# Altium PCB CT310高端控制盒核心板电路V1.3.PcbDoc (part 6 of 10)
Units mil, origin at the board's own origin, x right, y up, seen from the top; angles counter-clockwise.
Board outline 3735.76 x 4625 mil, 2 copper layers (TOP, BOTTOM), stack 10.4 mil thick; 198 components, 362 nets, 1085 pads, 352 vias.
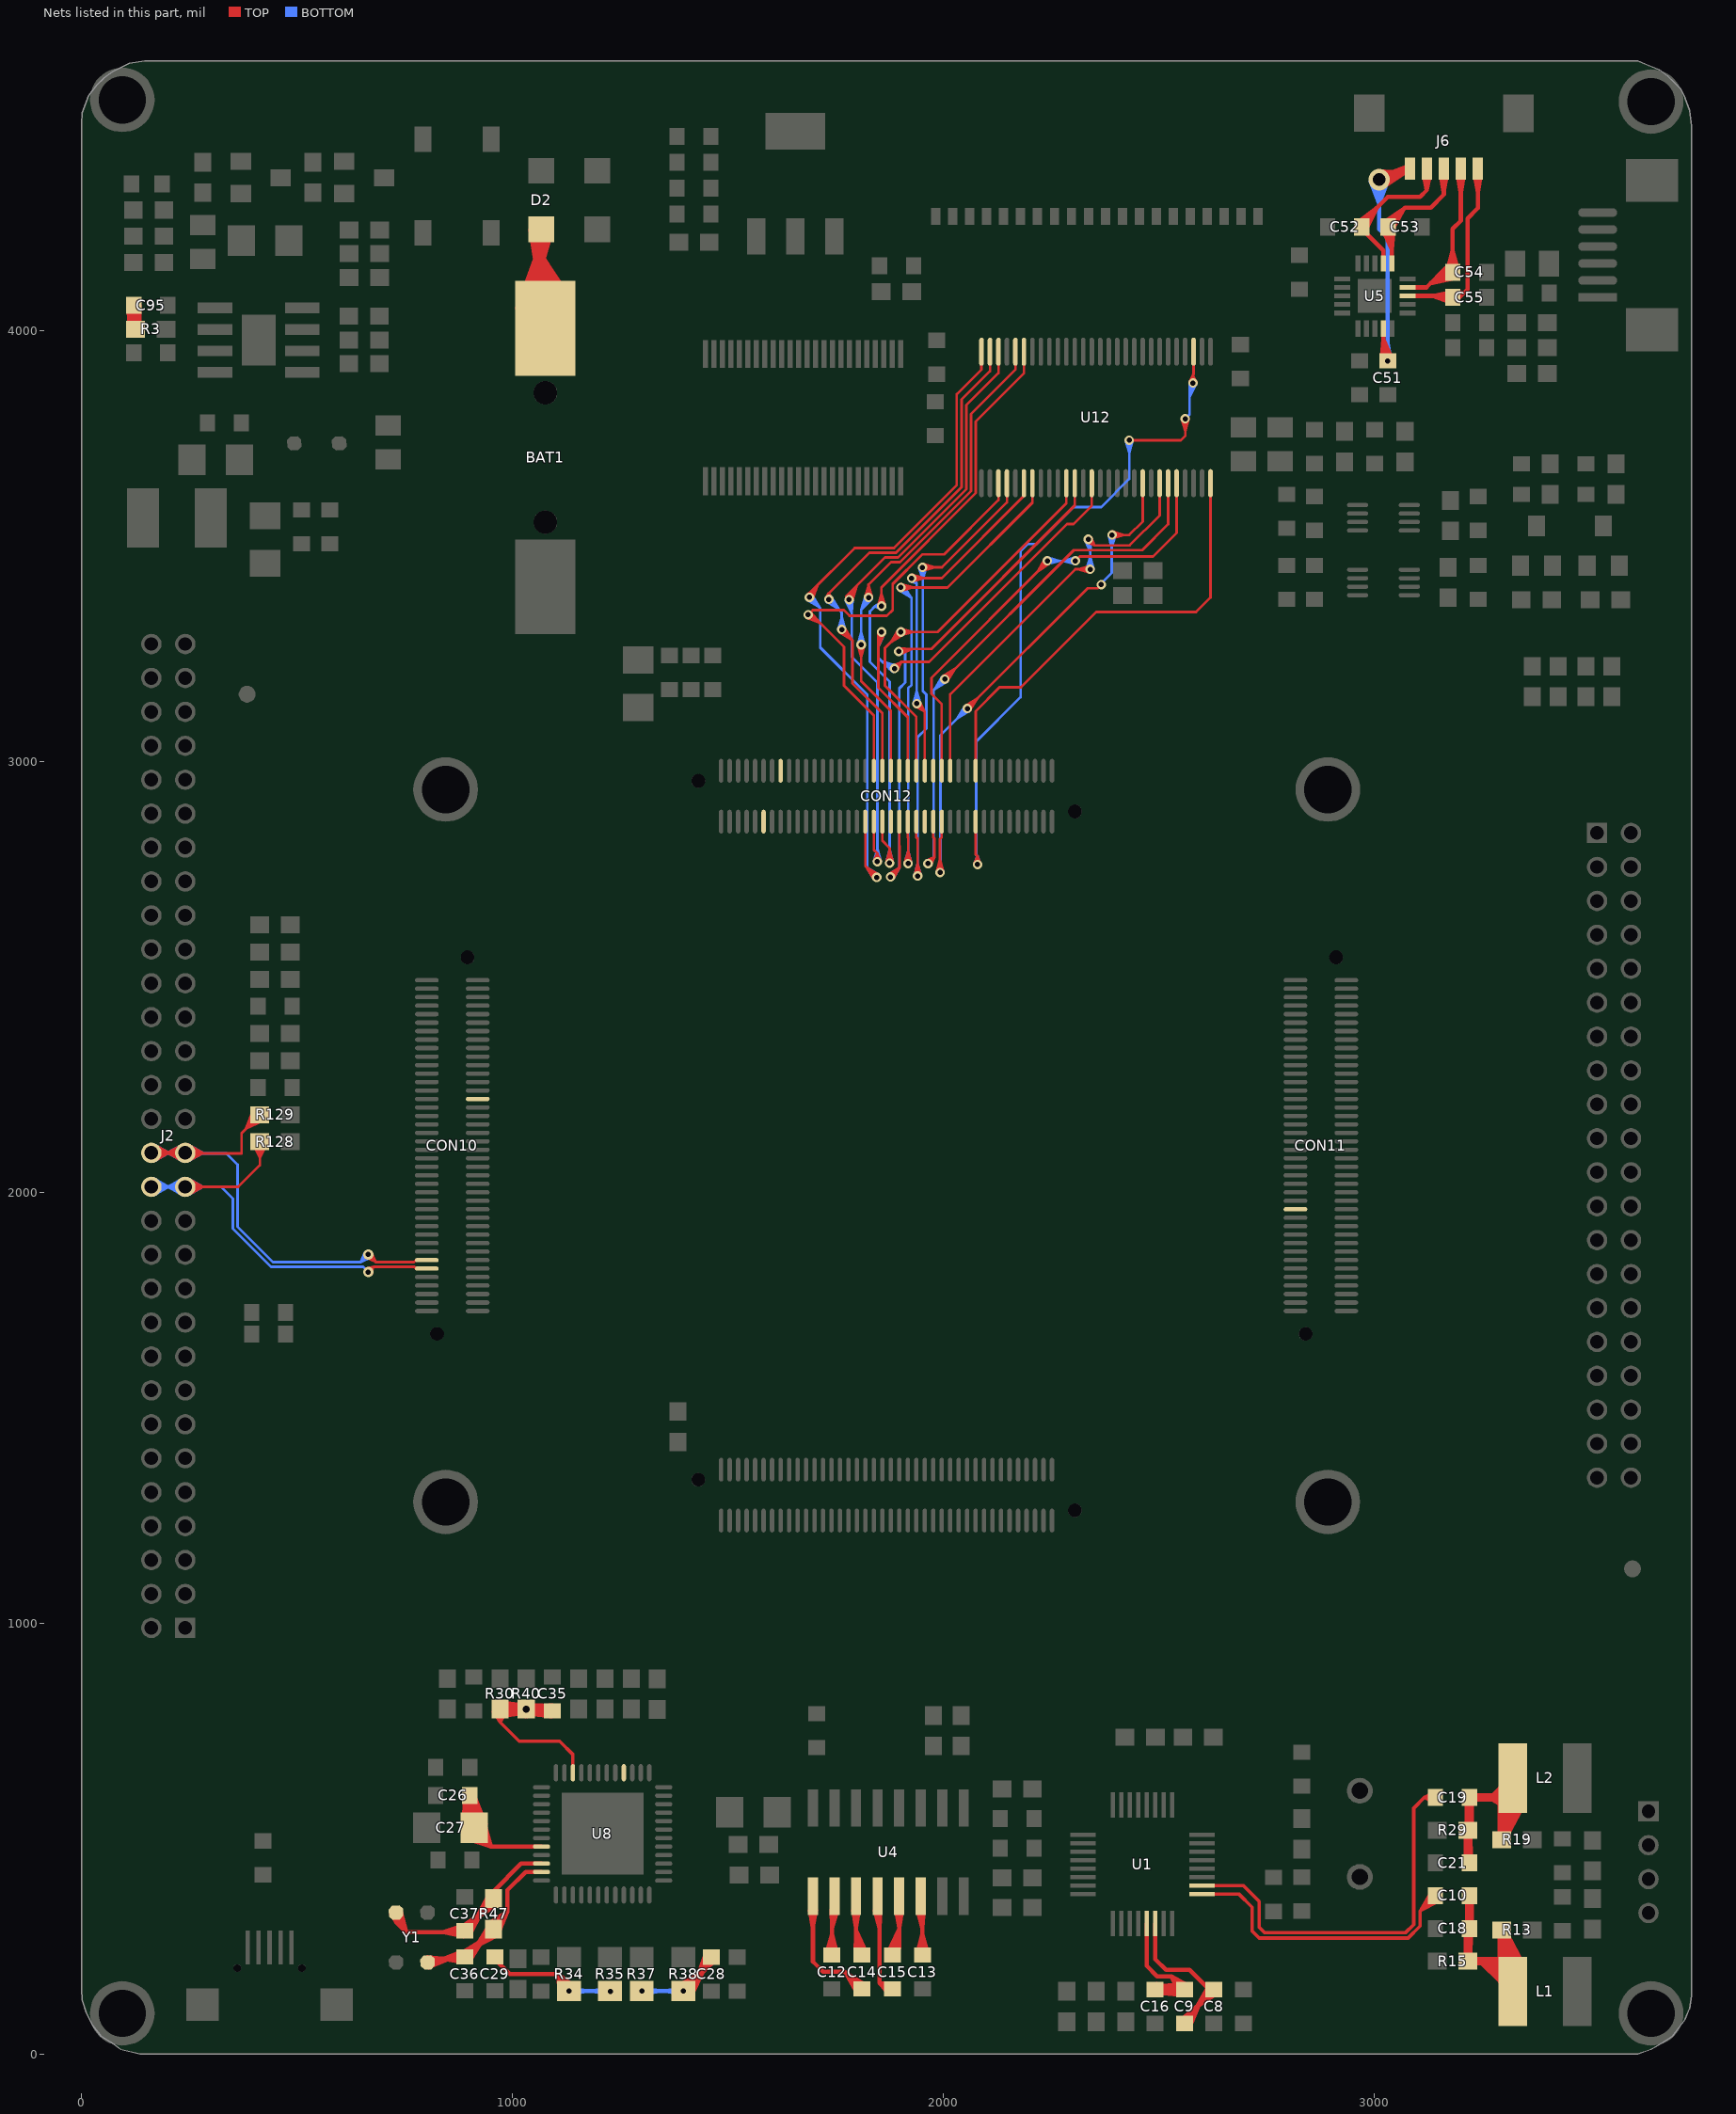
[diagram p6: the nets of this part, all layers, seen from the top]

## Via types
v1: diameter 22, hole 12, TOP to BOTTOM, tented both sides, 177 vias
v2: diameter 22, hole 12, TOP to BOTTOM, 89 vias
v3: diameter 28, hole 16, TOP to BOTTOM, 37 vias
v4: diameter 30, hole 20, TOP to BOTTOM, tented both sides, 26 vias
v5: diameter 24, hole 12, TOP to BOTTOM, 17 vias
v6: diameter 50, hole 30, TOP to BOTTOM, tented both sides, 5 vias
v7: diameter 40, hole 24, TOP to BOTTOM, 1 vias

## Nets (pads, with @x,y where several pads share a name; then routed paths per layer and width w, separated by ;. In a path a pad name is that pad's centre, name@x,y a point inside that pad or via, vN(x,y) a via of type N, cw(c..) or ccw(c..) an arc to the next point about the centre after c; other vN are vias at no path point) (continued)
LCD_VD4: CON12.27 U12.20 | length 1701.9
  TOP w6: v2@1983.69,2742.67 1991.61,2770.57 v2@1999.54,2742.67 ; v2(1991.61,2741.57) 1991.61,2819.43 1995.54,2823.36 ; CON12.27@1995.54,2837.36 1995.54,2823.36 ; CON12.27@1995.54,2859.86 1995.54,2823.36 ; v2@2049.97,3128.86 2078.64,3146.3 v2@2061.2,3117.63 ; v2(2054.91,3122.57) 2333.91,3401.57 2357.33,3401.57 v1(2365.76,3410) ; v1(2390.76,3525) 2430.76,3525 2461.88,3556.12 U12.20@2461.88,3645.4 ; v1@2391.86,3517.08 2419.76,3525 v1@2391.86,3532.92 ; 2461.88,3594.92 U12.20@2461.88,3618.23
  BOTTOM w6: v2@1983.79,2743.26 1991.61,2760.57 ; v2(1991.61,2741.57) 1991.61,2760.57 ; v2@1999.43,2743.26 1991.61,2760.57 ; v2@2048.62,3127.51 2031.18,3098.84 ; v2@2059.85,3116.28 2031.18,3098.84 ; v1(2365.76,3410) 2365.76,3413.13 2389.76,3437.13 2389.76,3524 v1(2390.76,3525) 2389.76,3495.96 ; v1@2382.8,3524.17 2389.76,3495.96 ; v1@2398.64,3523.63 2389.76,3495.96 ; 1991.61,2760.57 1992.61,2761.57 1992.61,3060.28 v2(2054.91,3122.57) 2031.18,3098.84
LCD_VD5: CON12.26 U12.22 | length 1290.5
  TOP w6: CON12.26@2015.23,2977.98 2015.23,3155.13 2305.67,3445.57 v1(2340.19,3445.57) 2311.19,3445.57 ; CON12.26@2015.23,3000.48 2015.23,3023.48 ; v1@2331.36,3508.32 2349.76,3501 ; v1(2335.76,3515) 2349.76,3501 ; v1@2339.09,3437.65 2311.19,3445.57 ; v1@2339.09,3453.49 2311.19,3445.57 ; v1@2342.44,3519.4 2349.76,3501 ; 2501.25,3594.92 U12.22@2501.25,3618.23 ; U12.22@2501.25,3645.4 2501.25,3570.49 2431.76,3501 2349.76,3501
  BOTTOM w6: v1@2328.07,3512.8 2340.19,3485.02 ; v1@2332.27,3446.67 2340.19,3474.57 v1@2348.11,3446.67 ; v1(2340.19,3445.57) 2340.19,3510.57 v1(2335.76,3515) 2340.19,3485.02 ; v1@2343.76,3515.11 2340.19,3485.02
LCD_VD6: CON12.29 U12.23 | length 1596.8
  TOP w6: v2@1959.13,2769.19 1978.61,2777.57 ; v2(1963.61,2762.57) 1978.61,2777.57 ; v2@1970.24,2758.08 1978.61,2777.57 ; CON12.29@1975.86,2837.36 1975.86,2823.36 ; CON12.29@1975.86,2859.86 1975.86,2823.36 ; v2@1997.81,3197 2026.48,3214.44 v2@2009.05,3185.77 ; v2(2002.76,3190.71) 2302.04,3490 2460.76,3490 2520.94,3550.18 U12.23@2520.94,3645.4 ; 2520.94,3594.92 U12.23@2520.94,3618.23 ; 1975.86,2823.36 1978.61,2820.61 1978.61,2777.57
  BOTTOM w6: v2@1959.27,2769.29 1977.05,2776.01 ; v2(1963.61,2762.57) 1977.05,2776.01 ; v2@1970.33,2758.23 1977.05,2776.01 ; v2@1996.47,3195.66 1979.03,3166.99 ; v2@2007.7,3184.42 1979.03,3166.99 ; 1977.05,2776.01 1977.05,3165.01 v2(2002.76,3190.71) 1979.03,3166.99
LCD_VD7: CON12.28 U12.24 | length 1313.8
  TOP w6: CON12.28@1995.54,2977.98 1995.54,3132.65 1971.61,3156.57 1971.61,3193.57 2240.76,3462.72 v1(2240.76,3465) 2218.16,3440.12 ; CON12.28@1995.54,3000.48 1995.54,3023.48 ; v1@2234.24,3469.64 2218.16,3440.12 ; v1@2246,3458.95 2218.16,3440.12 ; v1(2305.76,3465) 2315.76,3475 2485.76,3475 2540.62,3529.86 U12.24@2540.62,3645.4 ; 2540.62,3594.92 U12.24@2540.62,3618.23
  BOTTOM w6: v1(2240.76,3465) v1(2305.76,3465) ; v1@2241.86,3457.08 2269.76,3465 v1@2241.86,3472.92 ; v1@2304.66,3457.08 2276.76,3465 v1@2304.66,3472.92
LCD_VD8: CON12.31
LCD_VD9: CON12.30
LCD_VD10: CON12.33 U12.4 | length 1452.1
  TOP w6: v2@1931.69,2734.67 1939.61,2762.57 v2@1947.54,2734.67 ; CON12.33@1936.49,2837.36 1936.49,2823.36 ; CON12.33@1936.49,2859.86 1936.49,2823.36 ; v2(1939.61,2733.57) 1939.61,2820.24 1936.49,2823.36 ; v1(1950.76,3450) 1996.32,3450 2146.92,3600.6 ; v1@1951.86,3442.08 1979.76,3450 v1@1951.86,3457.92 ; U12.4@2146.92,3618.23 2146.92,3600.6 ; U12.4@2146.92,3645.4 2146.92,3600.6
  BOTTOM w6: v2@1931.69,2734.67 1939.61,2762.57 v2@1947.54,2734.67 ; v2(1939.61,2733.57) 1939.61,3055.57 1959.61,3075.57 1959.61,3154.86 1951.61,3162.86 1951.61,3449.15 v1(1950.76,3450) 1951.61,3420.97 ; v1@1942.87,3448.67 1951.61,3420.97 ; v1@1958.71,3449.13 1951.61,3420.97
LCD_VD11: CON12.32 U12.6 | length 1053.9
  TOP w6: v1(1925.76,3425) 1995.76,3425 2186.29,3615.53 U12.6@2186.29,3645.4 ; v1@1926.86,3417.08 1954.76,3425 v1@1926.86,3432.92 ; v2@1932.89,3127.12 1956.17,3115.02 ; v2(1937.61,3133.57) 1956.17,3115.02 ; v2@1944.07,3138.3 1956.17,3115.02 ; CON12.32@1956.17,2977.98 1956.17,3115.02 ; CON12.32@1956.17,3000.48 1956.17,3023.48
  BOTTOM w6: v1@1921.62,3418.16 1937.61,3413.15 ; v1(1925.76,3425) 1937.61,3413.15 ; v2@1929.69,3134.67 1937.61,3162.57 v2@1945.54,3134.67 ; v1@1932.6,3429.14 1937.61,3413.15 ; v2(1937.61,3133.57) 1937.61,3413.15
LCD_VD12: CON12.35 U12.7 | length 1457.1
  TOP w6: v1(1900.76,3403.42) 2009.18,3403.42 2205.98,3600.22 ; v1@1901.86,3395.5 1929.76,3403.42 v1@1901.86,3411.35 ; v2@1909.69,2763.67 1917.61,2791.57 v2@1925.54,2763.67 ; CON12.35@1916.8,2837.36 1916.8,2823.36 ; CON12.35@1916.8,2859.86 1916.8,2823.36 ; v2(1917.61,2762.57) 1917.61,2822.54 1916.8,2823.36 ; U12.7@2205.98,3618.23 2205.98,3600.22 ; U12.7@2205.98,3645.4 2205.98,3600.22
  BOTTOM w6: v1@1895.82,3397.13 1924.49,3379.7 v1@1907.05,3408.37 ; v1(1900.76,3403.42) 1925.61,3378.57 1925.61,3177.57 1917.61,3169.57 v2(1917.61,2762.57) ; v2@1909.69,2763.67 1917.61,2791.57 v2@1925.54,2763.67
LCD_VD13: CON12.34 U12.11 | length 1122.8
  TOP w6: v2@1894.47,3304.94 1877.03,3276.27 ; v2@1901.86,3292.08 1929.76,3300 v2@1901.86,3307.92 ; v2@1905.7,3293.71 1877.03,3276.27 ; CON12.34@1936.49,2977.98 1936.49,3102.69 1863.61,3175.57 1863.61,3262.85 v2(1900.76,3300) ; CON12.34@1936.49,3000.48 1936.49,3023.48 ; U12.11@2284.72,3618.23 2284.72,3598.96 ; U12.11@2284.72,3645.4 2284.72,3598.96 ; 1877.03,3276.27 v2(1900.76,3300) ; v2(1900.76,3300) 1985.76,3300 2284.72,3598.96
LCD_VD14: CON12.37 U12.12 | length 1578.7
  TOP w6: v2@1871.77,2737.94 1897.61,2752.57 ; v2(1876.61,2731.57) 1897.61,2752.57 ; v2@1882.98,2726.73 1897.61,2752.57 ; v2@1895.36,3262.99 1927.32,3260.57 ; v2(1895.76,3255) 1927.32,3260.57 ; 1897.12,2814.36 CON12.37@1897.12,2837.36 ; CON12.37@1897.12,2859.86 1897.12,2804.35 1897.61,2803.86 1897.61,2752.57 ; v2@1898.12,3247.36 1927.32,3260.57 ; v2@1903.61,3260.57 1971.33,3260.57 2304.4,3593.64 U12.12@2304.4,3645.4 ; 2304.4,3594.92 U12.12@2304.4,3618.23
  BOTTOM w6: v2@1871.79,2737.96 1897.05,2752.01 ; v2(1876.61,2731.57) 1897.05,2752.01 ; v2@1883,2726.75 1897.05,2752.01 ; v2(1895.76,3255) 1910.76,3253.42 ; v2@1897.06,3247.11 1910.76,3253.42 ; v2@1898.68,3262.45 1910.76,3253.42 ; v2@1903.61,3260.57 1910.76,3253.42 ; 1897.05,2752.01 1897.05,3169.01 1910.76,3182.72 1910.76,3253.42
LCD_VD15: CON12.36 U12.14 | length 1584.8
  TOP w6: v2@1847.8,3300.76 1848.61,3267.26 ; v2@1863.32,3297.37 1848.61,3267.26 ; v2@1881.23,3221.6 1901.21,3230.45 ; v2(1885.76,3215) 1901.21,3230.45 ; v2@1892.36,3210.47 1901.21,3230.45 ; CON12.36@1916.8,2977.98 1916.8,3102.39 1848.61,3170.57 1848.61,3292.85 v2(1855.76,3300) 1848.61,3267.26 ; CON12.36@1916.8,3000.48 1916.8,3023.48 ; 2343.77,3594.92 U12.14@2343.77,3618.23 ; U12.14@2343.77,3645.4 2343.77,3593.01 2301.33,3550.57 2286.33,3550.57 1966.21,3230.45 1901.21,3230.45
  BOTTOM w6: v2@1847.79,3300.74 1848.61,3266.53 ; 1848.61,3290.57 1848.61,3240 1873.61,3215 ; v2(1855.76,3300) 1848.61,3266.53 ; v2@1863.33,3297.43 1848.61,3266.53 ; v2@1880.95,3208.61 1856.81,3231.8 ; v2@1888.92,3222.35 1856.81,3231.8 ; 1856.81,3231.8 v2(1885.76,3215) ; 1873.61,3215 v2(1885.76,3215) ; 1873.61,3215 1883.13,3222.55 1873.61,3215 ; 1873.61,3215 1883.13,3207.45 1873.61,3215 ; 1873.61,3215 v2(1885.76,3215) ; 1873.61,3215 v2(1885.76,3215)
LCD_VD16: CON12.39
LCD_VD17: CON12.38
LCD_VD18: CON12.41 U12.51 | length 1730.2
  TOP w6: v2@1847.84,3361.1 1855.76,3389 v2@1863.68,3361.1 ; v2(1855.76,3360) 1855.76,3403.72 2074.55,3622.51 2074.55,3788.58 2186.29,3900.32 ; CON12.41@1857.75,2837.36 1857.75,2815.43 ; CON12.41@1857.75,2859.86 1857.75,2815.43 ; v2@1866.69,2764.67 1874.61,2792.57 v2@1882.54,2764.67 ; v2(1874.61,2763.57) 1874.61,2798.57 1857.75,2815.43 ; U12.51@2186.29,3923.35 2186.29,3900.32 ; U12.51@2186.29,3950.52 2186.29,3900.32
  BOTTOM w6: v2@1853.63,3352.29 1840.76,3360 ; v2@1853.63,3367.71 1840.76,3360 ; v2@1866.69,2764.67 1874.61,2792.57 v2@1882.54,2764.67 ; v2(1874.61,2763.57) 1874.61,3184.57 1828.61,3230.57 1828.61,3347.85 1840.76,3360 ; 1840.76,3360 v2(1855.76,3360) 1840.76,3360
LCD_VD19: CON12.40 U12.52 | length 1538.2
  TOP w6: v2@1800.69,3269.47 1808.61,3241.57 v2@1816.54,3269.47 ; v2(1808.61,3270.57) 1808.61,3185.57 1877.43,3116.76 CON12.40@1877.43,2977.98 ; v2@1817.84,3381.1 1825.76,3409 v2@1833.68,3381.1 ; v2(1825.76,3380) 1825.76,3410 1877.76,3462 1898.48,3462 2063.55,3627.07 2063.55,3805.98 2166.61,3909.03 ; CON12.40@1877.43,3000.48 1877.43,3023.48 ; U12.52@2166.61,3923.35 2166.61,3909.03 ; U12.52@2166.61,3950.52 2166.61,3909.03
  BOTTOM w6: v2@1800.69,3271.67 1808.61,3299.57 v2@1816.54,3271.67 ; v2(1808.61,3270.57) 1808.61,3351.57 1825.76,3368.72 ; v2@1818.43,3383.21 1809.2,3352.16 ; v2@1825.76,3380.57 1825.76,3368.72 ; v2@1832.08,3375.09 1809.2,3352.16 ; 1809.2,3352.16 v2(1825.76,3380) ; 1825.76,3368.72 v2(1825.76,3380) ; 1825.76,3368.72 1818.28,3377.16 1825.76,3368.72 ; 1825.76,3368.72 1833.24,3377.16 1825.76,3368.72 ; 1825.76,3368.72 v2(1825.76,3380)
LCD_VD20: CON12.43 U12.54 | length 1821
  TOP w6: v2@1774.17,3379.54 1798.34,3407.58 ; v2@1774.4,3381.36 1774.4,3383.64 1863.76,3473 1893.93,3473 2052.55,3631.63 2052.55,3826.58 2127.24,3901.26 ; v2(1780.76,3375) 1798.34,3407.58 ; v2@1788.17,3371.98 1798.34,3407.58 ; 1838.06,2814.36 CON12.43@1838.06,2837.36 ; CON12.43@1838.06,2859.86 1838.06,2794.19 1846.26,2785.98 ; v2@1838.44,2768.67 1846.26,2785.98 ; v2(1846.26,2766.98) 1846.26,2785.98 ; v2@1854.08,2768.67 1846.26,2785.98 ; U12.54@2127.24,3923.35 2127.24,3901.26 ; U12.54@2127.24,3950.52 2127.24,3901.26
  BOTTOM w6: v2@1773.14,3372.55 1786.61,3343.71 ; v2@1774.4,3381.36 1786.61,3369.15 1786.61,3242.57 1846.26,3182.92 v2(1846.26,2766.98) ; v2(1780.76,3375) 1786.61,3343.71 ; v2@1788.75,3375.47 1786.61,3343.71 ; v2@1838.34,2768.09 1846.26,2795.98 v2@1854.19,2768.09
LCD_VD21: CON12.42 U12.55 | length 1476.9
  TOP w6: v2@1725.93,3377.79 1733.61,3390 ; v2(1733.61,3375.57) 1733.61,3390 ; v2@1741.3,3377.79 1733.61,3390 ; v2@1758.67,3299.28 1787.34,3281.84 v2@1769.9,3310.51 ; v2(1763.61,3305.57) 1788.61,3280.57 1788.61,3180.57 1857.75,3111.43 CON12.42@1857.75,2977.98 ; CON12.42@1857.75,3000.48 1857.75,3023.48 ; U12.55@2107.55,3923.35 2107.55,3905.58 ; U12.55@2107.55,3950.52 2107.55,3905.58 ; 1733.61,3390 1827.61,3484 1889.37,3484 2041.55,3636.18 2041.55,3839.58 2107.55,3905.58
  BOTTOM w6: v2@1728.67,3369.28 1757.34,3351.84 v2@1739.9,3380.51 ; v2(1733.61,3375.57) 1763.61,3345.57 v2(1763.61,3305.57) ; v2@1755.69,3306.67 1763.61,3334.57 v2@1771.54,3306.67
LCD_VD22: CON12.45 U12.56 | length 2039.1
  TOP w6: v2@1682.54,3385.78 1708.57,3409.95 ; v2(1688.61,3380.57) 1708.57,3409.95 ; v2@1688.61,3390 1793.61,3495 1884.81,3495 2030.55,3640.74 2030.55,3851.72 2087.87,3909.03 ; v2@1695.7,3376.85 1708.57,3409.95 ; 1818.38,2814.36 CON12.45@1818.38,2837.36 ; CON12.45@1818.38,2859.86 1818.38,2756.8 v2(1844.61,2730.57) 1820.89,2754.3 ; v2@1838.32,2725.63 1820.89,2754.3 ; v2@1849.56,2736.86 1820.89,2754.3 ; U12.56@2087.87,3923.35 2087.87,3909.03 ; U12.56@2087.87,3950.52 2087.87,3909.03
  BOTTOM w6: v2@1683.67,3374.28 1712.34,3356.84 v2@1694.9,3385.51 ; v2(1688.61,3380.57) 1713.61,3355.57 1713.61,3264 1822.61,3155 1822.61,2752.57 ; v2@1838.28,2725.69 1822.61,2752.57 ; v2@1849.5,2736.91 1822.61,2752.57 ; 1822.61,2752.57 v2(1844.61,2730.57) 1822.61,2752.57
LCD_VD23: CON12.44 U12.3 | length 1195.7
  TOP w6: v2@1681.98,3332.95 1713.76,3320.42 ; v2(1685.76,3340) 1713.76,3320.42 ; v2@1691.08,3345.97 1713.76,3320.42 ; CON12.44@1838.06,2977.98 1838.06,3106.13 1768.61,3175.57 1768.61,3265.57 1689.97,3344.21 1696.33,3350.57 1768.61,3350.57 1781.61,3337.57 1868.33,3337.57 1881.76,3351 1881.76,3411.29 1950.47,3480 2000.76,3480 2127.24,3606.48 ; CON12.44@1838.06,3000.48 1838.06,3023.48 ; U12.3@2127.24,3618.23 2127.24,3606.48 ; U12.3@2127.24,3645.4 2127.24,3606.48
LCD_VOTCLK: CON12.19 U12.31 | length 1991
  TOP w6: v2@2070.79,2762.26 2078.61,2779.57 ; CON12.19@2074.28,2837.36 2074.28,2823.36 ; CON12.19@2074.28,2859.86 2074.28,2823.36 ; v2(2078.61,2760.57) 2078.61,2779.57 ; v2@2086.43,2762.26 2078.61,2779.57 ; v1(2430.76,3745) 2550.76,3745 2560.76,3755 v1(2560.76,3795) ; v1@2552.84,3793.9 2560.76,3766 v1@2568.68,3793.9 ; v1@2570.79,3879.33 2578.61,3896.64 ; v1(2578.61,3877.64) 2578.61,3896.64 ; 2579.99,3900.04 U12.31@2579.99,3923.35 ; U12.31@2579.99,3950.52 2579.99,3898.02 2578.61,3896.64 ; v1@2586.43,3879.33 2578.61,3896.64 ; 2074.28,2823.36 2074.61,2823.02 2074.61,2783.57 2078.61,2779.57
  BOTTOM w6: v2@2070.79,2762.26 2078.61,2779.57 ; v2(2078.61,2760.57) 2078.61,2779.57 ; v2@2086.43,2762.26 2078.61,2779.57 ; v1@2422.84,3743.9 2430.76,3716 v1@2438.68,3743.9 ; v1(2430.76,3745) 2430.76,3655 2365.76,3590 2301.32,3590 2215.32,3504 2194.76,3504 2178.61,3487.85 2178.61,3148.57 2075.61,3045.57 2075.61,2782.57 2078.61,2779.57 ; v1(2560.76,3795) 2570.76,3805 2570.76,3869.79 v1(2578.61,3877.64) 2570.76,3844.42 ; v1@2570.67,3878.56 2570.76,3844.42 ; v1@2586.13,3874.9 2570.76,3844.42
LCD_VSYNC: CON12.20 U12.28 | length 1104.4
  TOP w6: CON12.20@2074.28,2977.98 2074.28,3116.24 2129.61,3171.57 2179.61,3171.57 2354.36,3346.31 2585.81,3346.31 2619.36,3379.87 U12.28@2619.36,3645.4 ; CON12.20@2074.28,3000.48 2074.28,3023.48 ; 2619.36,3594.92 U12.28@2619.36,3618.23
LINK&ACT: U8.28
MD_RESETBB: CON11.56
MD_RSTN: CON12.66
MD_USBDN: CON10.13 J2.29 J2.30 R129.2 | length 3186.8
  TOP w6: J2.30@161.39,2091 J2.29@240.13,2091 ; J2.30@162.28,2082.42 203.01,2091 ; J2.30@162.28,2099.57 203.01,2091 ; J2.30@163.96,2076.6 203.01,2091 ; J2.30@163.96,2105.39 203.01,2091 ; J2.30@166.5,2071.02 203.01,2091 ; J2.30@166.5,2110.98 203.01,2091 ; J2.29@235.02,2071.02 198.51,2091 ; J2.29@235.02,2110.98 198.51,2091 ; J2.29@237.56,2076.6 198.51,2091 ; J2.29@237.56,2105.39 198.51,2091 ; J2.29@239.24,2082.42 198.51,2091 ; J2.29@239.24,2099.57 198.51,2091 ; J2.29@240.82,2082.4 281.77,2090 ; J2.29@241.23,2099.55 281.77,2090 ; J2.29@242.35,2076.55 281.77,2090 ; J2.29@243.04,2105.33 281.77,2090 ; J2.29@244.75,2070.9 281.77,2090 ; J2.29@245.71,2110.85 281.77,2090 ; R129.2@397.12,2188.44 380.77,2147.09 ; R129.2@402.6,2185.83 380.77,2147.09 ; R129.2@407.63,2182.52 380.77,2147.09 ; R129.2@411.21,2179.5 380.77,2147.09 ; R129.2@413.18,2179.5 370.76,2137.08 370.76,2090 241.13,2090 J2.29@240.13,2091 ; R129.2@414.45,2176.12 380.77,2147.09 ; R129.2@418.07,2171.3 380.77,2147.09 ; R129.2@421.02,2166 380.77,2147.09 ; v5@659.53,1847.65 681.88,1837.81 ; v5(664.61,1855.07) 681.88,1837.81 ; v5@672.04,1860.16 681.88,1837.81 ; CON10.13@778.16,1842.15 770.85,1837.81 ; CON10.13@800.66,1842.15 775.19,1842.15 770.85,1837.81 ; J2.29@240.13,2091 281.77,2090 ; 681.88,1837.81 770.85,1837.81
  BOTTOM w6: J2.30@161.39,2091 J2.29@240.13,2091 ; J2.30@162.28,2082.42 203.01,2091 ; J2.30@162.28,2099.57 203.01,2091 ; J2.30@163.96,2076.6 203.01,2091 ; J2.30@163.96,2105.39 203.01,2091 ; J2.30@166.5,2071.02 203.01,2091 ; J2.30@166.5,2110.98 203.01,2091 ; J2.29@235.02,2071.02 198.51,2091 ; J2.29@235.02,2110.98 198.51,2091 ; J2.29@237.56,2076.6 198.51,2091 ; J2.29@237.56,2105.39 198.51,2091 ; J2.29@239.24,2082.42 198.51,2091 ; J2.29@239.24,2099.57 198.51,2091 ; J2.29@240.82,2082.4 281.76,2090 ; J2.29@241.23,2099.55 281.76,2090 ; J2.29@242.35,2076.55 281.76,2090 ; J2.29@243.04,2105.33 281.76,2090 ; J2.29@244.75,2070.9 281.76,2090 ; J2.29@245.71,2110.85 281.76,2090 ; v5@657.2,1860.17 647.11,1837.57 ; v5@669.72,1847.66 647.11,1837.57 ; J2.29@240.13,2091 281.76,2090 ; J2.29@240.13,2091 241.13,2090 335.76,2090 361.76,2064 361.76,1919.56 443.75,1837.57 647.11,1837.57 ; 647.11,1837.57 v5(664.61,1855.07) 647.11,1837.57
MD_USBDP: CON10.11 J2.27 J2.28 R128.2 | length 2285.1
  TOP w6: J2.27@240.13,2012.26 363.02,2012.26 413.18,2062.42 R128.2@413.18,2116.57 ; J2.27@241.02,2003.68 281.75,2012.26 ; J2.27@241.02,2020.83 281.75,2012.26 ; J2.27@242.7,1997.86 281.75,2012.26 ; J2.27@242.7,2026.65 281.75,2012.26 ; J2.27@245.24,1992.28 281.75,2012.26 ; J2.27@245.24,2032.24 281.75,2012.26 ; R128.2@396.91,2112.88 413.18,2078.89 ; R128.2@402.6,2115.06 413.18,2078.89 ; R128.2@408.5,2116.28 413.18,2078.89 ; R128.2@417.86,2116.28 413.18,2078.89 ; R128.2@423.76,2115.06 413.18,2078.89 ; R128.2@429.45,2112.88 413.18,2078.89 ; v5@660.12,1822.37 676.85,1826.81 ; v5(664.61,1814.57) 676.85,1826.81 ; v5@672.41,1810.08 676.85,1826.81 ; CON10.11@778.16,1822.47 770.87,1826.81 ; CON10.11@800.66,1822.47 775.21,1822.47 770.87,1826.81 ; 676.85,1826.81 770.87,1826.81
  BOTTOM w6: J2.28@161.39,2012.26 J2.27@240.13,2012.26 323.5,2012.26 350.76,1985 350.76,1915 439.19,1826.57 652.61,1826.57 v5(664.61,1814.57) ; J2.28@162.28,2003.68 203.01,2012.26 ; J2.28@162.28,2020.83 203.01,2012.26 ; J2.28@163.96,1997.86 203.01,2012.26 ; J2.28@163.96,2026.65 203.01,2012.26 ; J2.28@166.5,1992.28 203.01,2012.26 ; J2.28@166.5,2032.24 203.01,2012.26 ; J2.27@235.02,1992.28 198.51,2012.26 ; J2.27@235.02,2032.24 198.51,2012.26 ; J2.27@237.56,1997.86 198.51,2012.26 ; J2.27@237.56,2026.65 198.51,2012.26 ; J2.27@239.24,2003.68 198.51,2012.26 ; J2.27@239.24,2020.83 198.51,2012.26 ; J2.27@241.02,2003.68 281.75,2012.26 ; J2.27@241.02,2020.83 281.75,2012.26 ; J2.27@242.7,1997.86 281.75,2012.26 ; J2.27@242.7,2026.65 281.75,2012.26 ; J2.27@245.24,1992.28 281.75,2012.26 ; J2.27@245.24,2032.24 281.75,2012.26
MD_WAKEUP_AP: CON12.69
MOTOR_PWM: CON10.52
NetBAT1_1: BAT1.1 D2.1 | length 1421
  TOP w20: BAT1.1@1016.16,4051.96 1060.76,4175.27 ; BAT1.1@1035.79,4046.54 1060.76,4175.27 ; D2.1@1045.79,4233.4 1060.76,4144.14 ; BAT1.1@1055.77,4044.23 1060.76,4175.27 ; BAT1.1@1060.76,4005 1060.76,4229.51 D2.1@1065.76,4234.51 1060.76,4144.14 ; BAT1.1@1075.76,4045 1060.76,4175.27 ; D2.1@1085.49,4231.21 1060.76,4144.14 ; BAT1.1@1095.4,4048.8 1060.76,4175.27 ; BAT1.1@1114.33,4055.58 1060.76,4175.27 ; BAT1.1@1132.21,4065.32 1060.76,4175.27
NetC8_2: C8.2 C9.2 U1.30 | length 712.1
  TOP w10: 2491.09,242.68 U1.30@2491.09,277.6 ; U1.30@2491.09,302.2 2491.09,219.67 2515.76,195 2570.76,195 2616.39,149.37 C8.2@2627.43,149.37 2559.09,81.04 C9.2@2559.09,70.63 ; C9.2@2551.67,79.21 2592.34,114.29 ; C9.2@2561.06,70.63 2592.34,114.29 ; C9.2@2572.2,64.5 2592.34,114.29 ; C8.2@2615.26,156.97 2588.5,110.44 ; C8.2@2625.46,149.37 2588.5,110.44 ; C8.2@2633.58,139.58 2588.5,110.44
NetC9_1: C9.1 C16.2 U1.29 | length 1168.4
  TOP w10: 2471.41,242.68 U1.29@2471.41,277.6 ; U1.29@2471.41,302.2 2471.41,204.35 2495.76,180 2528.46,180 ; C16.2@2490.76,149.37 C9.1@2559.09,149.37 2528.46,180 ; C16.2@2492.73,149.37 C9.1@2540.44,149.37 ; C16.2@2494.42,136.77 C9.1@2540.44,149.37 ; C16.2@2494.42,161.97 C9.1@2540.44,149.37 ; C9.1@2546.63,142.19 2528.46,180 ; C9.1@2553.29,137.25 C16.2@2507.68,158.34 ; C9.1@2553.29,161.49 C16.2@2507.68,140.4 ; C9.1@2557.79,136.67 C16.2@2507.68,140.4 ; C9.1@2557.79,162.07 C16.2@2507.68,158.34 ; C9.1@2564.99,159.37 2528.46,180 ; C16.2@2507.68,140.4 C9.1@2557.12,149.37 ; C16.2@2507.68,158.34 C9.1@2557.12,149.37 ; C16.2@2509.41,149.37 C9.1@2557.12,149.37 ; C16.2@2509.41,149.37 2555.43,161.97 C16.2@2509.41,149.37 ; C16.2@2509.41,149.37 2555.43,136.77 C16.2@2509.41,149.37 ; C16.2@2509.41,149.37 C9.1@2557.12,149.37 ; 2528.46,180 C9.1@2557.12,149.37
NetC10_1: C10.1 C18.1 L1.2 R13.2 R15.2 | length 1487.7
  TOP w20: R15.2@3218.16,215 3250.96,215 ; C18.1@3220.13,289.03 R15.2@3216.19,215 ; L1.2@3297.23,207.93 R13.2@3295.33,287.6 L1.2@3295.33,170.63 ; L1.2@3297.7,188.62 R13.2@3295.33,286.62 ; L1.2@3310.15,171.13 3250.96,215 ; L1.2@3316.1,209.95 3297.3,287.6 L1.2@3334.78,215.22 ; L1.2@3320.96,145 L1.2@3295.33,170.63 ; L1.2@3324.64,215.21 3250.96,215 ; L1.2@3342.74,200.82 R13.2@3295.33,286.62 ; R15.2@3216.19,215 3250.96,215 ; R15.2@3216.19,215 3216.19,287.06 C18.1@3220.13,291 ; C18.1@3220.13,291 3220.13,365.03 3220.13,292.97 C10.1@3220.13,367 C18.1@3220.13,291 ; 3250.96,215 3320.96,192 R13.2@3295.33,286.62 ; 3250.96,215 L1.2@3295.33,170.63
NetC10_2: C10.2 U1.1 | length 945.1
  TOP w8: U1.1@2599.36,371.1 2684.66,371.1 2715.76,340 2715.76,285 2732.14,268.62 3077.76,268.62 3105.76,296.62 3105.76,331.37 C10.2@3141.39,367 ; U1.1@2623.97,371.1 2652.89,371.1 ; C10.2@3130.64,373.55 3106.7,332.31 ; C10.2@3137.23,368.95 3106.7,332.31 ; C10.2@3141.39,365.03 3106.7,332.31 ; C10.2@3145.06,360.65 3106.7,332.31 ; C10.2@3149.27,353.8 3106.7,332.31
NetC12_2: C12.2 U4.2 | length 361.8
  TOP w10: C12.2@1728.16,231.06 1740.76,277.09 C12.2@1753.36,231.06 ; U4.2@1739.92,334.86 1740.76,292.42 ; C12.2@1740.76,229.37 1740.76,359.99 U4.2@1746.72,365.95 ; U4.2@1746.72,334.45 1740.76,292.42 ; U4.2@1753.36,332.96 1740.76,292.42
NetC13_1: C13.1 U4.6 | length 360
  TOP w10: C13.1@1938.16,231.06 1950.76,277.09 C13.1@1963.36,231.06 ; U4.6@1940.01,333.25 1950.76,292.54 ; U4.6@1946.72,334.45 1950.76,292.54 ; U4.6@1946.72,365.95 1950.76,361.91 C13.1@1950.76,229.37 ; U4.6@1953.53,334.56 1950.76,292.54
NetC14_1: C14.1 U4.3 | length 442
  TOP w10: U4.3@1789.93,333.9 1796.72,292.64 ; C14.1@1796.14,228.1 1796.72,286.17 ; U4.3@1796.72,334.45 1796.72,292.64 ; U4.3@1796.72,365.95 1796.72,243.41 C14.1@1810.76,229.37 ; U4.3@1803.51,333.9 1796.72,292.64 ; C14.1@1808.79,229.37 1796.72,286.17 ; C14.1@1820.87,233.36 1796.72,286.17
NetC14_2: C14.2 U4.1 | length 578.7
  TOP w10: U4.1@1689.93,333.9 1696.72,292.64 ; U4.1@1696.72,334.45 1696.72,292.64 ; U4.1@1696.72,365.95 1696.72,214.04 1719.82,190.94 1770.45,190.94 C14.2@1810.76,150.63 ; U4.1@1703.51,333.9 1696.72,292.64 ; C14.2@1798.6,143.03 1771.83,189.56 ; C14.2@1808.79,150.63 1771.83,189.56 ; C14.2@1816.91,160.42 1771.83,189.56
NetC15_1: C15.1 U4.4 | length 458.4
  TOP w10: U4.4@1840.02,333.2 1851.07,292.49 ; U4.4@1846.72,334.45 1851.07,292.49 ; U4.4@1846.72,365.95 1851.07,361.59 1851.07,164.69 ; U4.4@1853.53,334.61 1851.07,292.49 ; C15.1@1870.84,140.7 1851.07,164.69 ; C15.1@1878.79,150.63 1851.07,164.69 ; C15.1@1880.76,150.63 1865.13,150.63 1851.07,164.69 ; C15.1@1882.1,162.91 1851.07,164.69
NetC15_2: C15.2 U4.5 | length 430.8
  TOP w10: C15.2@1870.71,233.52 1896.72,289.33 ; C15.2@1882.73,229.37 1896.72,289.33 ; U4.5@1889.93,333.9 1896.72,292.64 ; C15.2@1895.34,227.78 1896.72,289.33 ; C15.2@1896.72,245.33 U4.5@1896.72,365.95 ; U4.5@1896.72,334.45 1896.72,292.64 ; U4.5@1903.51,333.9 1896.72,292.64
NetC19_1: C19.1 C21.1 L2.2 R19.1 R29.2 | length 1356.3
  TOP w20: C21.1@3220.13,443 3216.19,446.94 R29.2@3216.19,519 ; C21.1@3220.13,444.97 R29.2@3216.19,519 ; L2.2@3297.23,577.07 R19.1@3295.33,497.4 L2.2@3295.33,614.37 ; L2.2@3297.7,596.38 R19.1@3295.33,498.38 ; L2.2@3313.83,570.61 3275.96,595 ; L2.2@3315.84,615.94 3275.96,595 ; L2.2@3316.1,575.05 3297.3,497.4 L2.2@3334.78,569.78 ; L2.2@3320.96,640 L2.2@3295.33,614.37 ; L2.2@3342.74,584.18 R19.1@3295.33,498.38 ; R29.2@3216.19,519 R29.2@3220.13,522.94 ; R29.2@3220.13,522.94 3220.13,593.03 3218.16,519 C19.1@3220.13,595 ; R29.2@3220.13,522.94 C19.1@3220.13,595 ; C19.1@3220.13,595 3275.96,595 ; 3275.96,595 3320.96,593 R19.1@3295.33,498.38 ; 3275.96,595 L2.2@3295.33,614.37
NetC19_2: C19.2 U1.2 | length 1041.8
  TOP w8: U1.2@2599.36,390.79 2694.97,390.79 2732.07,353.69 2732.07,293.69 2744.14,281.62 3072.38,281.62 3090.76,300 3090.76,570 3115.76,595 ; U1.2@2623.97,390.79 2652.89,390.79 ; C19.2@3137.72,581.78 3115.76,595 ; C19.2@3137.72,608.22 3115.76,595 ; C19.2@3140.75,589.32 3115.76,595 ; C19.2@3140.75,600.68 3115.76,595 ; C19.2@3141.39,595 3115.76,595
NetC26_1: C26.1 C27.1 U8.44 | length 2616.4
  TOP w10: C27.1@884.61,525.45 C26.1@889.52,589.04 ; C27.1@885.04,534.82 C26.1@912.13,594.15 ; C26.1@887.53,596.34 C27.1@900.13,550.31 ; C27.1@894.56,531.34 C26.1@912.13,594.15 ; C27.1@894.75,525.47 C26.1@889.52,589.04 ; C27.1@896.79,498.62 949.72,481.04 ; C26.1@900.13,598.03 C27.1@900.13,550.31 ; C26.1@900.13,600 900.13,535.75 C27.1@910.88,525 910.88,519.88 949.72,481.04 ; C27.1@900.87,507.95 949.72,481.04 ; C27.1@904.4,529.39 C26.1@912.13,594.15 ; C27.1@904.65,527.08 C26.1@889.52,589.04 ; C27.1@906.49,516.28 949.72,481.04 ; C27.1@910.88,521.06 949.72,481.04 ; C26.1@912.73,596.34 C27.1@900.13,550.31 ; C27.1@915.8,525.31 949.72,481.04 ; C27.1@916.88,531.42 C26.1@889.52,589.04 ; C27.1@917.37,529.14 C26.1@912.13,594.15 ; C27.1@924.28,530.67 949.72,481.04 ; C27.1@925.58,536.42 C26.1@889.52,589.04 ; C27.1@926.63,533.85 C26.1@900.13,591.08 ; C27.1@926.64,533.79 C26.1@900.13,591.85 ; C27.1@927.28,530.71 C26.1@912.13,594.15 ; C27.1@933.46,542.8 C26.1@889.52,589.04 ; C27.1@933.73,534.47 949.72,481.04 ; C27.1@935.46,538.84 C26.1@900.13,591.08 ; C27.1@935.5,538.72 C26.1@900.13,591.85 ; C27.1@936.92,533.82 C26.1@912.13,594.15 ; 1016.88,481.04 U8.44@1051.88,481.04 ; U8.44@1066.88,481.04 949.72,481.04 ; C26.1@889.52,589.04 C27.1@910.88,528.94 ; C26.1@900.13,591.08 C27.1@910.88,528.94 ; C26.1@900.13,591.08 917.21,530.37 C26.1@900.13,591.85 ; C26.1@900.13,591.08 904.43,528.16 C26.1@900.13,591.85 ; C26.1@900.13,591.08 894.4,528.28 C26.1@900.13,591.85 ; C26.1@900.13,591.08 884.4,530.01 C26.1@900.13,591.85 ; C26.1@900.13,591.85 C27.1@910.88,528.94 ; C27.1@910.88,528.94 C26.1@912.13,594.15
NetC28_2: C28.2 R37.2 R38.2 | length 1348.2
  TOP w10: R37.2@1299.09,145.63 v1(1300.13,145.63) ; R38.2@1388.03,160.14 1440.6,190.47 ; R38.2@1391.64,150 1427.6,179.76 ; R38.2@1391.81,150.14 1427.97,177.84 R38.2@1400.27,141.68 ; R38.2@1391.88,150.21 1428.72,177.45 ; R38.2@1392.05,150.35 1432.11,177.99 ; R38.2@1393.76,151.88 1440.6,190.47 ; R38.2@1399.7,145.63 1440.6,190.47 ; R38.2@1400.02,141.4 1432.11,177.99 ; R38.2@1400.2,141.6 1428.72,177.45 ; R38.2@1400.4,141.83 1427.6,179.76 ; R38.2@1406.46,140.29 1440.6,190.47 ; R38.2@1415.22,135.34 1440.6,190.47 ; C28.2@1447.42,230.06 1428.83,178.7 ; C28.2@1458.79,224.37 1428.83,178.7 ; C28.2@1460.76,224.37 1460.76,210.63 v1(1395.76,145.63) ; C28.2@1468.54,216.2 1428.83,178.7 ; v1(1395.76,145.63) 1428.72,177.45 ; v1(1395.76,145.63) 1432.11,177.99 ; v1(1395.76,145.63) 1427.6,179.76
  BOTTOM w10: v1(1300.13,145.63) v1(1395.76,145.63) ; v1@1300.57,139.65 1341.13,145.63 v1@1300.57,151.61 ; v1@1395.32,139.65 1354.76,145.63 v1@1395.32,151.61
NetC29_2: C29.2 R34.2 R35.2 | length 1574.4
  TOP w10: C29.2@958.61,224.94 958.61,219.1 992.71,185 1105.76,185 ; R34.2@1108.93,140.46 1105.76,185 ; R34.2@1125.48,142.77 1106.36,184.4 ; R34.2@1125.47,142.8 1107.46,182.92 ; R34.2@1125.51,142.72 1106.1,183.9 ; R34.2@1126.82,145.63 1105.76,185 ; R34.2@1127.03,150.33 R34.2@1141.05,157.65 ; R34.2@1127.79,150.85 R34.2@1118.86,142.32 ; R34.2@1130.92,139.63 R34.2@1118.86,142.32 ; R34.2@1134,150.41 1105.76,185 ; R34.2@1135.97,142.66 R34.2@1141.05,157.65 ; R35.2@1225.76,145.63 v1(1226.39,145) ; 1105.76,185 v1(1130.76,145.63) ; 1105.76,185 R34.2@1135.61,149.17 ; 1105.76,185 1125.5,142.75 1107.29,182.15 ; 1105.76,185 R34.2@1118.86,142.32 ; 1105.76,185 R34.2@1141.05,157.65 ; 1105.76,185 R34.2@1130.76,160 ; 1106.1,183.9 v1(1130.76,145.63) ; 1106.1,183.9 1135.58,149.21 1107.29,182.15 ; 1106.36,184.4 v1(1130.76,145.63) ; 1106.36,184.4 R34.2@1135.62,149.15 ; 1107.29,182.15 v1(1130.76,145.63) ; 1107.46,182.92 v1(1130.76,145.63) ; 1107.46,182.92 R34.2@1135.62,149.15 ; R34.2@1118.86,142.32 v1(1130.76,145.63) ; v1(1130.76,145.63) R34.2@1141.05,157.65 ; v1(1130.76,145.63) R34.2@1130.76,160 ; v1(1130.76,145.63) R34.2@1130.76,160 ; R34.2@1130.76,160 1136.63,146.88 R34.2@1130.76,160 ; R34.2@1130.76,160 1124.89,146.88 R34.2@1130.76,160
  BOTTOM w10: v1(1130.76,145.63) 1225.76,145.63 v1(1226.39,145) 1185.37,145.63 ; v1@1131.2,139.65 1171.76,145.63 v1@1131.2,151.61 ; v1@1225.86,139.02 1185.37,145.63 ; v1@1226.04,150.99 1185.37,145.63
NetC35_2: C35.2 R30.1 R40.1 U8.34 | length 12400.6
  TOP w8: R30.1@955.35,793.75 970.4,770.36 ; R30.1@962.79,797.11 970.4,770.36 ; R30.1@969.25,790.57 R40.1@1013.38,787.77 ; R30.1@969.47,782.51 R40.1@1013.38,787.77 ; R30.1@969.88,809.77 R40.1@1017.7,809.14 ; R30.1@970.12,790.49 R40.1@1013.98,792.72 ; R30.1@970.38,792.45 R40.1@1014.43,796.2 ; R30.1@970.6,792.46 R40.1@1015.64,797.47 ; R30.1@970.67,817.79 R40.1@1017.7,809.14 ; R30.1@970.91,809.77 R40.1@1017.08,802.83 ; R30.1@971.15,794.46 R40.1@1017.08,802.83 ; R30.1@971.26,782.51 R40.1@1013.98,792.72 ; R30.1@971.5,807.74 R40.1@1015.64,797.47 ; R30.1@971.75,807.7 R40.1@1014.43,796.2 ; R30.1@971.8,784.52 R40.1@1014.43,796.2 ; R30.1@972.02,805.68 R40.1@1013.98,792.72 ; R30.1@972.14,794.62 R40.1@1017.7,809.14 ; R30.1@972.2,784.56 R40.1@1015.64,797.47 ; R30.1@972.79,817.61 R40.1@1017.08,802.83 ; R30.1@972.85,805.45 R40.1@1013.38,787.77 ; R30.1@973.28,786.69 R40.1@1017.08,802.83 ; R30.1@974.02,815.4 R40.1@1015.64,797.47 ; R30.1@974.55,815.26 R40.1@1014.43,796.2 ; R30.1@975.09,813.14 R40.1@1013.98,792.72 ; R30.1@975.22,787.18 R40.1@1017.7,809.14 ; R30.1@976.74,812.52 R40.1@1013.38,787.77 ; R30.1@978.01,797.11 970.4,770.36 ; R30.1@985.45,793.75 970.4,770.36 ; R40.1@1021.43,798.47 R40.1@1029.19,782.63 ; R40.1@1022.11,796.18 R40.1@1033.4,782.63 ; R40.1@1026.75,791.23 994.2,813.46 ; R40.1@1027.39,790.93 993.97,810.54 ; R40.1@1027.58,809.42 994,790.6 ; R40.1@1027.68,809.46 993.79,790.97 ; R40.1@1027.69,790.81 993.32,809.46 ; R40.1@1027.8,813.46 R30.1@987.44,796.2 ; R40.1@1028.16,790.64 R30.1@990.08,808.48 ; R40.1@1028.23,790.62 R30.1@988.21,808.73 ; R40.1@1028.39,790.57 993.62,806.36 ; R40.1@1028.4,809.71 990.59,793.07 ; R40.1@1028.52,809.75 993.48,794.42 ; R40.1@1028.54,809.75 R30.1@984.39,791.92 ; R40.1@1028.66,809.78 993.51,795 ; R40.1@1028.97,809.86 991.26,795.7 ; R40.1@1028.99,809.87 992.98,796.2 ; R40.1@1029.03,809.88 993.31,796.46 ; R40.1@1029.27,809.93 R30.1@987.44,796.2 ; R40.1@1029.3,790.34 R30.1@989.53,803.55 ; R40.1@1029.3,809.94 992.51,797.33 ; R40.1@1029.36,809.95 R30.1@989.21,796.96 ; R40.1@1029.39,790.32 R30.1@986.33,803.77 ; R40.1@1029.55,809.98 R30.1@989.25,797.76 ; R40.1@1029.77,790.25 1068.52,789.34 ; R40.1@1029.88,790.24 1068.97,789.71 ; R40.1@1029.92,790.23 C35.2@1076.76,788.8 ; R40.1@1030.07,790.21 1072.29,790.03 ; R40.1@1030.28,805.79 R30.1@987.44,796.2 ; R40.1@1030.29,810.09 1069.21,808.99 ; R40.1@1030.73,790.15 992.51,797.33 ; R40.1@1030.83,790.15 1068.94,793.38 ; R40.1@1030.86,790.15 R30.1@989.21,796.96 ; R40.1@1030.91,810.13 R30.1@989.53,803.55 ; R40.1@1030.96,790.49 R30.1@987.44,796.2 ; R40.1@1031.02,790.14 992.98,796.2 ; R40.1@1031.1,790.14 C35.2@1080.31,794.19 ; R40.1@1031.15,790.14 991.26,795.7 ; R40.1@1031.24,810.14 C35.2@1075.24,805.37 ; R40.1@1031.33,790.14 993.51,795 ; R40.1@1031.29,810.14 C35.2@1073.39,805.14 ; R40.1@1031.35,790.14 1072.29,795.36 ; R40.1@1031.43,790.14 1071.32,795.7 ; R40.1@1031.48,790.14 993.48,794.42 ; R40.1@1031.62,790.14 C35.2@1087.42,796.98 ; R40.1@1031.62,790.49 C35.2@1075.16,796.2 ; R40.1@1031.62,810.13 993.62,806.36 ; R40.1@1031.64,790.14 1069.27,796.47 ; R40.1@1031.8,790.15 990.59,793.07 ; R40.1@1031.86,790.15 1070.08,797.34 ; R40.1@1031.93,810.12 C35.2@1087.41,801.57 ; R40.1@1031.98,790.16 R30.1@984.39,791.92 ; R40.1@1032.03,810.11 C35.2@1083.97,801.26 ; R40.1@1032.06,790.17 C35.2@1074.55,798.46 ; R40.1@1032.31,805.79 C35.2@1075.16,796.2 ; R40.1@1032.42,810.07 993.32,809.46 ; R40.1@1032.49,790.21 994,790.6 ; R40.1@1032.71,810.04 993.97,810.54 ; R40.1@1032.74,810.03 C35.2@1087.42,796.98 ; R40.1@1032.83,810.02 C35.2@1074.55,798.46 ; R40.1@1033.22,809.95 C35.2@1073.38,796.96 ; R40.1@1033.5,809.89 C35.2@1080.31,794.19 ; R40.1@1033.55,809.88 1069.27,796.47 ; R40.1@1033.59,790.41 C35.2@1075.24,805.37 ; R40.1@1033.64,790.42 C35.2@1073.39,805.14 ; R40.1@1033.65,809.86 1072.29,795.36 ; R40.1@1034.15,790.55 1069.03,806.16 ; R40.1@1034.19,809.71 1068.98,793.97 ; R40.1@1034.33,809.67 1068.94,793.38 ; R40.1@1034.73,809.53 C35.2@1076.76,788.8 ; R40.1@1034.78,813.46 C35.2@1075.16,796.2 ; R40.1@1034.8,790.77 1069.21,808.99 ; R40.1@1034.82,809.5 1072.29,790.03 ; R40.1@1035.17,809.36 1068.97,789.71 ; R40.1@1035.3,809.3 1068.52,789.34 ; R40.1@1040.48,796.18 R40.1@1029.19,782.63 ; R40.1@1041.15,798.47 R40.1@1033.4,782.63 ; C35.2@1084.56,783.71 R40.1@1047.12,808.19 ; C35.2@1085.32,809.01 R40.1@1047.33,787.15 ; C35.2@1086.11,783.11 R40.1@1047.71,802.34 ; C35.2@1086.86,809.5 R40.1@1048.15,792.66 ; C35.2@1087.58,782.74 R40.1@1048.45,797.4 ; C35.2@1087.96,782.67 R40.1@1048.5,796.2 ; C35.2@1087.96,809.73 R40.1@1048.5,796.2 ; C35.2@1088.34,790.8 R40.1@1047.12,808.19 ; C35.2@1088.36,809.79 R40.1@1048.45,797.4 ; C35.2@1088.68,801.71 R40.1@1047.33,787.15 ; C35.2@1089.03,790.61 R40.1@1047.71,802.34 ; C35.2@1089.13,782.53 R40.1@1048.15,792.66 ; C35.2@1089.35,801.85 R40.1@1048.15,792.66 ; C35.2@1089.66,790.51 R40.1@1048.45,797.4 ; C35.2@1089.83,790.5 R40.1@1048.5,796.2 ; C35.2@1089.83,801.9 R40.1@1048.5,796.2 ; C35.2@1089.99,801.91 R40.1@1048.45,797.4 ; C35.2@1089.99,809.92 R40.1@1047.71,802.34 ; C35.2@1090.31,790.49 R40.1@1048.15,792.66 ; C35.2@1090.91,782.5 R40.1@1047.33,787.15 ; C35.2@1091.03,790.54 R40.1@1047.33,787.15 ; C35.2@1091.82,809.82 R40.1@1047.12,808.19 ; C35.2@1092.19,796.2 974.34,796.2 R30.1@970.4,800.14 ; U8.34@1139.72,652.3 1139.72,694.47 ; U8.34@1139.72,667.3 1139.72,694.47 ; 970.4,770.36 R30.1@970.4,798.17 ; 970.4,770.36 R30.1@970.4,800.14 ; 970.4,770.36 1015.19,725.57 1108.61,725.57 1139.72,694.47 ; R30.1@970.4,798.17 R40.1@1013.98,792.72 ; R30.1@970.4,798.17 R40.1@1013.38,787.77 ; R30.1@970.4,800.14 v3(1031.29,800.14) ; R30.1@970.4,800.14 1030.47,810.1 R30.1@970.4,800.14 ; R30.1@970.4,800.14 1030.47,790.17 R30.1@970.4,800.14 ; R30.1@970.4,800.14 v3(1031.29,800.14) ; R30.1@970.4,800.14 R40.1@1015.64,797.47 ; R30.1@970.4,800.14 R40.1@1014.43,796.2 ; R30.1@970.4,802.11 v3(1031.29,800.14) ; R30.1@970.4,802.11 1030.8,810.13 R30.1@970.4,802.11 ; R30.1@970.4,802.11 1030.15,790.2 R30.1@970.4,802.11 ; R30.1@970.4,802.11 v3(1031.29,800.14) ; R30.1@970.4,802.11 R40.1@1017.08,802.83 ; R30.1@970.4,802.11 R40.1@1017.7,809.14 ; R30.1@977.45,796.31 v3(1031.29,800.14) ; R30.1@977.45,796.31 R40.1@1029.66,810 ; R30.1@977.45,796.31 1031.08,790.14 R30.1@987.44,796.2 ; R30.1@984.39,791.92 v3(1031.29,800.14) ; R30.1@986.33,803.77 v3(1031.29,800.14) ; R30.1@986.33,803.77 1030.99,810.13 1069.03,806.16 ; R30.1@987.44,796.2 v3(1031.29,800.14) ; R30.1@987.44,796.2 1031.29,798.17 C35.2@1075.16,796.2 ; R30.1@987.44,796.2 R40.1@1029.19,782.63 ; R30.1@988.21,808.73 v3(1031.29,800.14) ; R30.1@988.21,808.73 1032.12,810.1 R30.1@990.08,808.48 ; R30.1@989.21,796.96 v3(1031.29,800.14) ; R30.1@989.25,797.76 v3(1031.29,800.14) ; R30.1@989.25,797.76 R40.1@1030.67,790.16 ; R30.1@989.53,803.55 v3(1031.29,800.14) ; R30.1@990.08,808.48 v3(1031.29,800.14) ; 990.59,793.07 v3(1031.29,800.14) ; 991.26,795.7 v3(1031.29,800.14) ; 992.51,797.33 v3(1031.29,800.14) ; 992.98,796.2 v3(1031.29,800.14) ; 993.31,796.46 v3(1031.29,800.14) ; 993.31,796.46 1030.94,790.14 1068.98,793.97 ; 993.32,809.46 v3(1031.29,800.14) ; 993.48,794.42 v3(1031.29,800.14) ; 993.51,795 v3(1031.29,800.14) ; 993.62,806.36 v3(1031.29,800.14) ; 993.79,790.97 v3(1031.29,800.14) ; 993.79,790.97 R40.1@1032.39,790.2 ; 993.97,810.54 v3(1031.29,800.14) ; 994,790.6 v3(1031.29,800.14) ; 994.2,813.46 v3(1031.29,800.14) ; 994.2,813.46 1033.45,809.9 1069.26,796.8 ; R40.1@1014.43,796.2 v3(1031.29,800.14) ; R40.1@1014.43,796.2 R40.1@1026.31,808.81 ; R40.1@1014.43,796.2 R40.1@1030.66,790.16 ; R40.1@1014.43,796.2 v3(1031.29,800.14) ; R40.1@1014.43,796.2 R40.1@1026.31,808.81 ; R40.1@1014.43,796.2 R40.1@1030.66,790.16 ; R40.1@1014.43,796.2 v3(1031.29,800.14) ; R40.1@1014.43,796.2 R40.1@1026.31,808.81 ; R40.1@1014.43,796.2 R40.1@1030.66,790.16 ; R40.1@1014.43,796.2 v3(1031.29,800.14) ; R40.1@1014.43,796.2 R40.1@1026.31,808.81 ; R40.1@1014.43,796.2 R40.1@1030.66,790.16 ; R40.1@1014.43,796.2 v3(1031.29,800.14) ; R40.1@1014.43,796.2 R40.1@1026.31,808.81 ; R40.1@1014.43,796.2 R40.1@1030.66,790.16 ; R40.1@1015.64,797.47 v3(1031.29,800.14) ; R40.1@1015.64,797.47 R40.1@1026.59,808.96 ; R40.1@1015.64,797.47 R40.1@1029.79,790.25 ; R40.1@1015.64,797.47 v3(1031.29,800.14) ; R40.1@1015.64,797.47 R40.1@1026.59,808.96 ; R40.1@1015.64,797.47 R40.1@1029.79,790.25 ; R40.1@1015.64,797.47 v3(1031.29,800.14) ; R40.1@1015.64,797.47 R40.1@1026.59,808.96 ; R40.1@1015.64,797.47 R40.1@1029.79,790.25 ; R40.1@1015.64,797.47 v3(1031.29,800.14) ; R40.1@1015.64,797.47 R40.1@1026.59,808.96 ; R40.1@1015.64,797.47 R40.1@1029.79,790.25 ; R40.1@1015.64,797.47 v3(1031.29,800.14) ; R40.1@1015.64,797.47 R40.1@1026.59,808.96 ; R40.1@1015.64,797.47 R40.1@1029.79,790.25 ; R40.1@1017.08,802.83 v3(1031.29,800.14) ; R40.1@1017.08,802.83 R40.1@1029.65,810 ; R40.1@1017.08,802.83 R40.1@1026.15,791.56 ; R40.1@1017.08,802.83 v3(1031.29,800.14) ; R40.1@1017.08,802.83 R40.1@1029.65,810 ; R40.1@1017.08,802.83 R40.1@1026.15,791.56 ; R40.1@1017.08,802.83 v3(1031.29,800.14) ; R40.1@1017.08,802.83 R40.1@1029.65,810 ; R40.1@1017.08,802.83 R40.1@1026.15,791.56 ; R40.1@1017.08,802.83 v3(1031.29,800.14) ; R40.1@1017.08,802.83 R40.1@1029.65,810 ; R40.1@1017.08,802.83 R40.1@1026.15,791.56 ; R40.1@1017.08,802.83 v3(1031.29,800.14) ; R40.1@1017.08,802.83 R40.1@1029.65,810 ; R40.1@1017.08,802.83 R40.1@1026.15,791.56 ; R40.1@1029.19,782.63 v3(1031.29,800.14) ; R40.1@1029.46,809.97 R40.1@1047.12,808.19 ; R40.1@1029.46,809.97 R40.1@1047.12,808.19 ; R40.1@1029.46,809.97 R40.1@1047.12,808.19 ; R40.1@1029.46,809.97 R40.1@1047.12,808.19 ; R40.1@1029.46,809.97 R40.1@1047.12,808.19 ; v3(1031.29,800.14) 1069.62,796.2 ; v3(1031.29,800.14) 1069.27,796.47 ; v3(1031.29,800.14) 1071.32,795.7 ; v3(1031.29,800.14) 1070.08,797.34 ; v3(1031.29,800.14) R40.1@1033.4,782.63 ; v3(1031.29,800.14) C35.2@1075.16,796.2 ; v3(1031.29,800.14) R40.1@1048.5,796.2 ; v3(1031.29,800.14) 1069.61,796.2 ; v3(1031.29,800.14) R40.1@1048.5,796.2 ; v3(1031.29,800.14) C35.2@1087.41,801.57 ; v3(1031.29,800.14) R40.1@1048.5,796.2 ; v3(1031.29,800.14) 1068.94,793.38 ; v3(1031.29,800.14) R40.1@1048.5,796.2 ; v3(1031.29,800.14) C35.2@1075.24,805.37 ; v3(1031.29,800.14) R40.1@1048.5,796.2 ; v3(1031.29,800.14) 1068.52,789.34 ; v3(1031.29,800.14) R40.1@1048.45,797.4 ; v3(1031.29,800.14) 1069.26,796.8 ; v3(1031.29,800.14) R40.1@1048.45,797.4 ; v3(1031.29,800.14) C35.2@1083.97,801.26 ; v3(1031.29,800.14) R40.1@1048.45,797.4 ; v3(1031.29,800.14) 1068.98,793.97 ; v3(1031.29,800.14) R40.1@1048.45,797.4 ; v3(1031.29,800.14) C35.2@1073.39,805.14 ; v3(1031.29,800.14) R40.1@1048.45,797.4 ; v3(1031.29,800.14) 1068.97,789.71 ; v3(1031.29,800.14) R40.1@1047.71,802.34 ; v3(1031.29,800.14) C35.2@1074.55,798.46 ; v3(1031.29,800.14) R40.1@1047.71,802.34 ; v3(1031.29,800.14) C35.2@1090.66,801.9 ; v3(1031.29,800.14) R40.1@1047.71,802.34 ; v3(1031.29,800.14) 1072.29,795.36 ; v3(1031.29,800.14) R40.1@1047.71,802.34 ; v3(1031.29,800.14) 1069.03,806.16 ; v3(1031.29,800.14) R40.1@1047.71,802.34 ; v3(1031.29,800.14) 1072.29,790.03 ; v3(1031.29,800.14) R40.1@1047.12,808.19 ; v3(1031.29,800.14) C35.2@1087.42,796.98 ; v3(1031.29,800.14) R40.1@1047.12,808.19 ; v3(1031.29,800.14) C35.2@1091.39,801.79 ; v3(1031.29,800.14) R40.1@1047.12,808.19 ; v3(1031.29,800.14) C35.2@1080.31,794.19 ; v3(1031.29,800.14) R40.1@1047.12,808.19 ; v3(1031.29,800.14) 1069.21,808.99 ; v3(1031.29,800.14) R40.1@1047.12,808.19 ; v3(1031.29,800.14) C35.2@1076.76,788.8 ; v3(1031.29,800.14) C35.2@1073.38,796.96 ; R40.1@1031.57,790.14 1069.62,796.2 ; R40.1@1031.54,790.14 C35.2@1075.16,796.2 ; R40.1@1031.57,790.14 1069.61,796.2 ; R40.1@1031.92,790.16 R40.1@1048.5,796.2 ; R40.1@1031.92,790.16 R40.1@1048.5,796.2 ; R40.1@1031.92,790.16 R40.1@1048.5,796.2 ; R40.1@1031.92,790.16 R40.1@1048.5,796.2 ; R40.1@1031.92,790.16 R40.1@1048.5,796.2 ; R40.1@1032.43,790.2 C35.2@1090.66,801.9 ; R40.1@1032.4,790.2 C35.2@1091.39,801.79 ; R40.1@1032.63,790.23 R40.1@1048.45,797.4 ; R40.1@1032.63,790.23 R40.1@1048.45,797.4 ; R40.1@1032.63,790.23 R40.1@1048.45,797.4 ; R40.1@1032.63,790.23 R40.1@1048.45,797.4 ; R40.1@1032.63,790.23 R40.1@1048.45,797.4 ; R40.1@1033.02,809.99 R40.1@1047.71,802.34 ; R40.1@1033.02,809.99 R40.1@1047.71,802.34 ; R40.1@1033.02,809.99 R40.1@1047.71,802.34 ; R40.1@1033.02,809.99 R40.1@1047.71,802.34 ; R40.1@1033.02,809.99 R40.1@1047.71,802.34 ; R40.1@1033.4,782.63 C35.2@1075.16,796.2 ; R40.1@1033.6,809.87 1069.62,796.2 ; R40.1@1033.62,809.86 1071.32,795.7 ; R40.1@1033.6,809.87 1069.61,796.2 ; R40.1@1035.55,791.09 R40.1@1047.71,802.34 ; R40.1@1035.55,791.09 R40.1@1047.71,802.34 ; R40.1@1035.55,791.09 R40.1@1047.71,802.34 ; R40.1@1035.55,791.09 R40.1@1047.71,802.34 ; R40.1@1035.55,791.09 R40.1@1047.71,802.34 ; R40.1@1035.64,809.14 R40.1@1048.45,797.4 ; R40.1@1035.64,809.14 R40.1@1048.45,797.4 ; R40.1@1035.64,809.14 R40.1@1048.45,797.4 ; R40.1@1035.64,809.14 R40.1@1048.45,797.4 ; R40.1@1035.64,809.14 R40.1@1048.45,797.4 ; R40.1@1036.19,808.86 R40.1@1048.5,796.2 ; R40.1@1036.19,808.86 R40.1@1048.5,796.2 ; R40.1@1036.19,808.86 R40.1@1048.5,796.2 ; R40.1@1036.19,808.86 R40.1@1048.5,796.2 ; R40.1@1036.19,808.86 R40.1@1048.5,796.2 ; R40.1@1038.15,792.86 R40.1@1047.12,808.19 ; R40.1@1038.15,792.86 R40.1@1047.12,808.19 ; R40.1@1038.15,792.86 R40.1@1047.12,808.19 ; R40.1@1038.15,792.86 R40.1@1047.12,808.19 ; R40.1@1038.15,792.86 R40.1@1047.12,808.19 ; R40.1@1047.12,808.19 C35.2@1090.22,796.2 ; R40.1@1047.12,808.19 C35.2@1091.39,801.79 ; R40.1@1047.33,787.15 C35.2@1090.22,796.2 ; R40.1@1047.71,802.34 C35.2@1090.22,796.2 ; R40.1@1047.71,802.34 C35.2@1090.66,801.9 ; R40.1@1048.15,792.66 C35.2@1090.22,796.2 ; R40.1@1048.45,797.4 C35.2@1090.22,796.2 ; R40.1@1048.5,796.2 C35.2@1090.22,796.2 ; 1069.26,796.8 1031.73,790.15 C35.2@1073.38,796.96 ; 1070.08,797.34 1033.29,809.94 C35.2@1075.16,796.2 ; C35.2@1083.97,801.26 1032.45,790.21 C35.2@1087.41,801.57 ; C35.2@1090.66,801.9 1031.84,810.12 C35.2@1091.39,801.79
NetC36_1: C36.1 R47.1 U8.47 Y1.1 | length 1183.4
  TOP w10: Y1.1@801.87,223.96 850.8,219.94 ; Y1.1@805.46,201.11 850.8,219.94 ; C36.1@882.78,234.98 929.17,262.98 ; C36.1@883.68,237.31 838.58,219.94 ; C36.1@886.29,212.23 838.58,219.94 ; C36.1@886.65,224.94 838.58,219.94 ; C36.1@888.61,219.94 809.92,219.94 Y1.1@802.3,212.32 850.8,219.94 ; C36.1@888.61,224.94 891.13,224.94 R47.1@955.76,289.57 955.76,299.09 988.04,331.38 ; C36.1@890.58,224.94 929.17,262.98 ; C36.1@900.51,216.99 929.17,262.98 ; R47.1@944.34,296.83 914.86,248.67 ; R47.1@945.79,302.32 988.04,331.38 ; R47.1@955.76,287.6 914.86,248.67 ; R47.1@955.76,291.54 988.04,331.38 ; R47.1@964.42,275.74 914.86,248.67 ; R47.1@968.38,284.02 988.04,331.38 ; U8.47@1051.88,421.99 1030.03,421.99 ; U8.47@1066.88,421.99 1030.03,421.99 ; 988.04,331.38 988.04,380 1030.03,421.99
NetC37_1: C37.1 R47.2 U8.46 Y1.3 | length 1236.8
  TOP w10: Y1.3@719.62,321.08 753.06,282.7 ; Y1.3@740.07,331.92 753.06,282.7 ; C37.1@882.16,295.16 926.08,325.46 ; C37.1@884.19,298.11 838.77,282.7 ; C37.1@885.73,272.95 838.77,282.7 ; C37.1@886.65,285.63 838.77,282.7 ; C37.1@888.61,282.7 753.06,282.7 ; C37.1@888.61,285.63 888.61,287.99 955.76,355.14 R47.2@955.76,360.43 955.76,377.72 1019.72,441.67 ; C37.1@890.58,285.63 926.08,325.46 ; C37.1@901.02,278.36 926.08,325.46 ; R47.2@943.78,366.96 916.63,316.01 ; R47.2@955.76,358.46 916.63,316.01 ; R47.2@965.2,347.22 916.63,316.01 ; U8.46@1051.88,441.67 1019.72,441.67 ; U8.46@1066.88,441.67 1019.72,441.67 ; 729.22,306.54 Y1.3@729.22,327.68 ; 729.22,306.54 718.02,324.47 729.22,306.54 ; 729.22,306.54 740.42,324.47 729.22,306.54 ; 729.22,306.54 Y1.3@729.22,327.68 ; 729.22,306.54 753.06,282.7 ; 729.22,306.54 Y1.3@729.22,327.68 ; Y1.3@729.22,327.68 753.06,282.7
NetC51_2: C51.2 J6.5 U5.9 | length 2263.2
  TOP w10: v6@3008.83,4369.91 J6.5@3070.36,4365.83 ; v6@3008.99,4359.84 J6.5@3070.36,4365.83 ; v6@3014.1,4340.57 J6.5@3070.36,4365.83 ; v6@3018.96,4331.76 J6.5@3070.36,4365.83 ; 3020.44,3955.51 U5.9@3020.44,3991.42 ; U5.9@3020.44,4004.21 3020.44,3949.69 ; C51.2@3024.8,3928.7 3022.74,3973.64 ; C51.2@3029.05,3935.12 C51.2@3016.13,3928.15 ; C51.2@3029.33,3935.2 C51.2@3016.09,3928.86 ; C51.2@3029.74,3923.46 C51.2@3016.09,3928.86 ; C51.2@3030.03,3923.42 C51.2@3016.13,3928.15 ; C51.2@3036.52,3931.07 3021.96,3969.8 ; C51.2@3036.58,3930.83 3022.74,3973.64 ; C51.2@3036.55,3930.94 3020.44,3978.76 ; C51.2@3038.65,3937.4 3020.44,3949.69 ; C51.2@3040.96,3933.06 3020.44,3978.76 ; J6.5@3080.02,4382.34 3037.83,4365.83 ; J6.5@3082.02,4365.83 3026.59,4365.83 v6(3010.76,4350) J6.5@3070.36,4365.83 ; J6.5@3082.02,4375.83 3037.83,4365.83 ; J6.5@3083.02,4369.09 3037.83,4365.83 ; C51.2@3016.13,3928.15 v1(3030.76,3929.37) ; C51.2@3016.13,3928.15 3020.44,3949.69 ; C51.2@3016.09,3928.86 v1(3030.76,3929.37) ; C51.2@3016.09,3928.86 3020.44,3978.76 ; 3020.44,3949.69 v1(3030.76,3929.37) ; 3020.44,3949.69 C51.2@3035.71,3932.77 ; 3020.44,3949.69 C51.2@3025.1,3927.38 ; 3020.44,3949.69 v1(3030.76,3929.37) ; 3020.44,3949.69 C51.2@3035.71,3932.77 ; 3020.44,3949.69 C51.2@3025.1,3927.38 ; 3020.44,3949.69 v1(3030.76,3929.37) ; 3020.44,3949.69 C51.2@3035.71,3932.77 ; 3020.44,3949.69 C51.2@3025.1,3927.38 ; 3020.44,3949.69 3028.79,3929.37 3020.44,3978.76 ; 3020.44,3978.76 v1(3030.76,3929.37) ; 3020.44,3978.76 3024.82,3928.49 3021.96,3969.8 ; 3021.96,3969.8 v1(3030.76,3929.37) ; 3022.74,3973.64 v1(3030.76,3929.37)
  BOTTOM w10: v6@2991.09,4346.36 3010.76,4295 ; v6@3000.8,4349.09 3010.76,4295 ; v6(3010.76,4350) 3010.76,4235 3030.76,4215 v1(3030.76,3929.37) ; v6@3020.72,4349.09 3010.76,4295 ; v1@3024.78,3929.81 3030.76,3970.37 v1@3036.74,3929.81 ; v6@3030.43,4346.36 3010.76,4295
NetC52_2: C52.2 J6.4 U5.17 | length 629.7
  TOP w10: C52.2@2961.32,4251.14 3005.43,4284.67 ; C52.2@2970.13,4241.97 3005.43,4284.67 ; C52.2@2980.8,4235.04 3005.43,4284.67 ; U5.17@3020.44,4155.79 3020.44,4185.32 ; U5.17@3020.44,4168.58 3020.44,4185.32 ; J6.4@3114.61,4361.41 3121.39,4325.63 ; J6.4@3121.39,4362.05 3121.39,4325.63 ; J6.4@3121.39,4365.83 3121.39,4325.63 ; J6.4@3128.17,4361.41 3121.39,4325.63 ; 3020.44,4185.32 2970.13,4235.63 C52.2@2970.13,4240 2970.13,4249.37 3030.76,4310 3105.76,4310 3121.39,4325.63
NetC53_2: C53.2 J6.3 U5.16 | length 779.5
  TOP w10: C53.2@3019.25,4234.26 3040.13,4188.43 ; C53.2@3023.04,4251.56 3068.32,4282.56 ; C53.2@3031.39,4238.03 3040.13,4188.43 ; C53.2@3031.39,4241.97 3068.32,4282.56 ; U5.16@3040.13,4155.79 3040.13,4231.26 C53.2@3031.39,4240 3031.39,4245.63 3070.76,4285 3130.76,4285 3160.76,4315 J6.3@3160.76,4365.83 ; U5.16@3040.13,4168.58 3040.13,4204.49 ; C53.2@3041.72,4234.56 3068.32,4282.56 ; C53.2@3044.09,4238.64 3040.13,4188.43 ; J6.3@3153.97,4361.49 3160.76,4320.24 ; J6.3@3160.76,4362.05 3160.76,4320.24 ; J6.3@3167.55,4361.49 3160.76,4320.24
NetC54_2: C54.2 J6.2 U5.14 | length 821.2
  TOP w10: U5.14@3076.55,4099.69 3120.45,4099.69 ; U5.14@3089.34,4099.69 3120.45,4099.69 ; C54.2@3168.79,4138.66 3181.39,4184.69 ; C54.2@3174.8,4143.9 3130.14,4109.38 ; C54.2@3181.39,4133.03 3130.14,4109.38 ; C54.2@3181.39,4136.97 3181.39,4184.69 ; C54.2@3185.38,4120.96 3130.14,4109.38 ; J6.2@3193.34,4361.49 3200.13,4320.24 ; C54.2@3193.99,4138.66 3181.39,4184.69 ; J6.2@3200.13,4362.05 3200.13,4320.24 ; J6.2@3200.13,4365.83 3200.13,4254.37 3181.39,4235.63 3181.39,4145 3165.76,4145 3120.45,4099.69 ; J6.2@3206.92,4361.49 3200.13,4320.24
NetC55_2: C55.2 J6.1 U5.13 | length 813.7
  TOP w10: U5.13@3076.55,4080 3174.72,4080 3181.39,4086.67 3207.43,4086.67 ; U5.13@3089.34,4080 3125.25,4080 ; C55.2@3178.84,4064.21 3133.33,4080 ; C55.2@3180.58,4091.33 3207.43,4086.67 ; C55.2@3180.59,4089.36 3133.33,4080 ; C55.2@3181.39,4076.67 3133.33,4080 ; C55.2@3181.39,4078.64 3207.43,4086.67 ; C55.2@3187.87,4067.69 3207.43,4086.67 ; J6.1@3232.71,4361.49 3239.5,4320.24 ; J6.1@3239.5,4362.05 3239.5,4320.24 ; J6.1@3239.5,4365.83 3239.5,4283.74 3215.76,4260 3215.76,4095 3207.43,4086.67 ; J6.1@3246.29,4361.49 3239.5,4320.24
NetC95_1: C95.1 R3.1 | length 1544.8
  TOP w8: C95.1@107.13,4055.03 R3.1@116.55,4014.2 ; C95.1@107.15,4057.07 R3.1@110.33,4014.45 ; R3.1@107.24,4004.96 C95.1@120.82,4046.74 ; C95.1@107.29,4053.63 R3.1@120.82,4014.17 ; C95.1@107.38,4053.16 R3.1@122.28,4014.17 ; C95.1@107.87,4051.37 R3.1@128.08,4014.29 ; C95.1@108.65,4049.56 R3.1@134.5,4014.72 ; R3.1@115.11,4003.18 C95.1@120.82,4046.74 ; C95.1@115.13,4055.29 R3.1@122.28,4014.17 ; C95.1@115.12,4055.49 R3.1@120.82,4014.17 ; C95.1@115.11,4056.08 R3.1@116.55,4014.2 ; C95.1@115.2,4056.91 R3.1@110.33,4014.45 ; C95.1@115.27,4054.52 R3.1@128.08,4014.29 ; C95.1@115.52,4053.73 R3.1@134.5,4014.72 ; C95.1@120.82,4057.85 120.82,4006.79 R3.1@124.76,4002.85 ; R3.1@122.79,4002.85 C95.1@120.82,4046.74 ; C95.1@126.25,4054.12 R3.1@110.33,4014.45 ; C95.1@126.35,4057.33 R3.1@134.5,4014.72 ; C95.1@126.45,4054.92 R3.1@116.55,4014.2 ; C95.1@126.52,4055.49 R3.1@120.82,4014.17 ; C95.1@126.53,4055.69 R3.1@122.28,4014.17 ; C95.1@126.5,4056.48 R3.1@128.08,4014.29 ; R3.1@130.41,4003.87 C95.1@120.82,4046.74 ; C95.1@133.4,4050.43 R3.1@110.33,4014.45 ; C95.1@134.05,4052.27 R3.1@116.55,4014.2 ; C95.1@134.35,4053.63 R3.1@120.82,4014.17 ; C95.1@134.36,4058.1 R3.1@134.5,4014.72 ; C95.1@134.42,4054.11 R3.1@122.28,4014.17 ; C95.1@134.53,4056.02 R3.1@128.08,4014.29 ; R3.1@138.08,4006.34 C95.1@120.82,4046.74 ; R3.1@110.33,4014.45 C95.1@120.82,4055.89 ; R3.1@116.55,4014.2 C95.1@120.82,4055.89 ; R3.1@120.82,4014.17 C95.1@120.82,4055.89 ; C95.1@120.82,4055.89 R3.1@122.28,4014.17 ; C95.1@120.82,4055.89 R3.1@128.08,4014.29 ; C95.1@120.82,4055.89 R3.1@134.5,4014.72